# Altium PCB 模型USB.PcbDoc
Units mil, origin at the board's own origin, x right, y up, seen from the top; angles counter-clockwise.
Board outline 640 x 455 mil, 2 copper layers (Top Layer, Bottom Layer); 5 components, 6 nets, 34 pads, 7 vias.
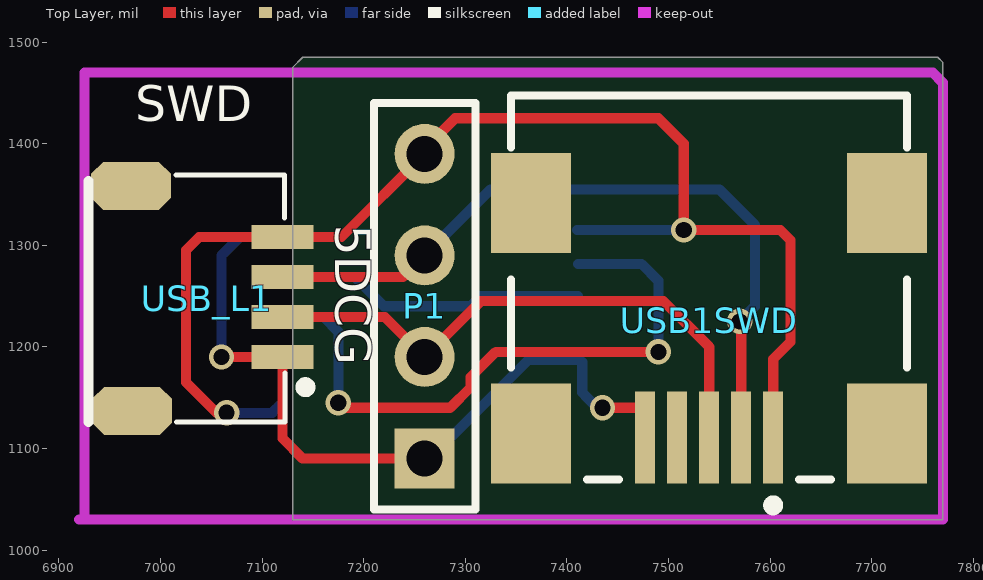
[diagram p0: Top Layer view]
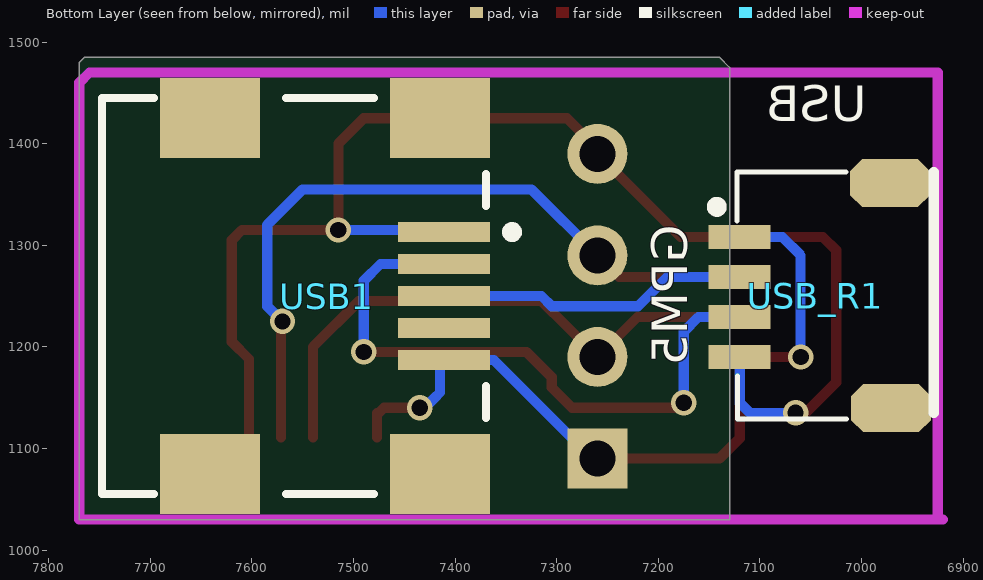
[diagram p1: Bottom Layer view, seen from below]

## Layer stack, top to bottom
Top Layer: signal copper 1.4
Dielectric: dielectric 12.6, FR-4, Dk 4.8
Bottom Layer: signal copper 1.4

## Board outline
7130,1030 7770,1030 7770,1480 7765,1485 7140,1485 7130,1475

## Design rules (kind name [scope] priority, off if disabled: settings)
Clearance [All] p1: gap=10
PolygonConnect [All] p1: connectstyle=Relief reliefconductorwidth=10 reliefentries=4 polygonreliefangle="90 Angle"
RoutingVias [All] p1: holewidth=28 width=50 viastyle="Through Hole" minholewidth=16 minwidth=25 maxholewidth=28 maxwidth=50
SilkscreenOverComponentPads [All] p1: minsilkscreentomaskgap=10
SolderMaskExpansion [All] p1: expansion=4
Width [All] p1: maxlimit=10 minlimit=10 preferedwidth=10
27 further rules are at their usual default settings.

## Components (designator, comment, footprint, x,y, rotation, side; value= is the part's Value field where it differs from the comment)
P1 "Header 4" HDR1X4 7260,1090 r90 top
USB1 "USB-B(Mini)" USB/SM0.8-6H5_M 7720,1250 r0 bottom
USB1SWD "USB-B(Mini)" USB/SM0.8-6H5_M 7540,1420 r90 top
USB_L1 "Header 4" SH1.0-4P 7120,1190 r90 top
USB_R1 "Header 4" SH1.0-4P 7120,1308.11 r270 bottom

## Footprints (in the part's own frame and the unit in brackets; to place one, negate y for a bottom-side part, rotate by r counter-clockwise, add the part's x,y. Pads: shape width x height; smd on the part's side, far side on the other; paste and mask are expansions set on the pad)
HDR1X4 [mm] "Connector; Header; 4 Position"
  rect 1.5x1.5 hole 0.9: 1(0,0)
  round 1.5 hole 0.9: 2(2.54,0) 3(5.08,0) 4(7.62,0)
  silkscreen extent -1.27,-1.27 8.89,1.27
SH1.0-4P [mm]
  rect 0.6x1.55 smd: 1(0,0) 2(1,0) 3(2,0) 4(3,0)
  oct 1.2x2 smd: A(-1.346,3.759) B(4.279,3.785)
  silkscreen extent -1.63,-0.7 4.55,4.85
USB/SM0.8-6H5_M [mm]
  rect 2.3x0.5 smd: 1(-7.85,-1.6) 2(-7.85,-0.8) 3(-7.85,0) 4(-7.85,0.8) 5(-7.85,1.6)
  rect 2.5x2 smd: 6(-7.75,4.45) 7(-1.996,4.45) 8(-7.75,-4.45) 9(-1.996,-4.45)
  silkscreen extent -9.67,-4.95 0.7,4.95

## Part data
P1 USB_L1 USB_R1: "Header, 4-Pin"
USB1 USB1SWD: library part USB5

## Via types
v1: diameter 25, hole 16, Top Layer to Bottom Layer, 7 vias

## Nets (pads, with @x,y where several pads share a name; then routed paths per layer and width w, separated by ;. In a path a pad name is that pad's centre, name@x,y a point inside that pad or via, vN(x,y) a via of type N, cw(c..) or ccw(c..) an arc to the next point about the centre after c; other vN are vias at no path point)
5V: P1.4 USB1.1 USB1SWD.1 USB_L1.4 USB_R1.4 | length 1342.5
  Top Layer w10: v1(7065,1135) 7055,1135 7025,1165 7025,1295 7038.11,1308.11 USB_L1.4 7178.11,1308.11 P1.4 ; P1.4@7257.5,1392.5 7290,1425 7490,1425 7515,1400 v1(7515,1315) 7610,1315 7620,1305 7620,1205 7602.99,1187.99 USB1SWD.1
  Bottom Layer w10: v1(7065,1135) 7110,1135 7120,1145 USB_R1.4 ; USB1.1@7410,1315 v1(7515,1315)
DM: USB1.2 USB_R1.3 | length 630.5
  Top Layer w10: v1@7175,1140 7285,1140 7305,1160 7305,1170 7330,1195 v1(7490,1195)
  Bottom Layer w10: USB_R1.3 7160.63,1229.37 7175,1215 v1(7175,1145) ; USB1.2 7473.5,1281.5 7490,1265 v1(7490,1195)
DP: USB1.3 USB_R1.2 | length 307
  Bottom Layer w10: USB_R1.2 7191.26,1268.74 7220,1240 7305,1240 7315,1250 USB1.3
GND: P1.1 USB1.5 USB1SWD.5 USB_L1.1 USB_R1.1 | length 779.3
  Top Layer w10: v1(7060,1190) USB_L1.1 7120,1110 7140,1090 P1.1 ; v1(7435,1140) 7470,1140 USB1SWD.5@7475,1135 ; USB1SWD.5 USB1SWD.5@7477.01,1135
  Bottom Layer w10: v1(7060,1190) 7060,1290 7078.11,1308.11 USB_R1.1 ; P1.1@7250,1095 7270,1095 7362.01,1187.01 USB1.5 ; USB1.5@7415,1185 7415,1155 7420,1150 v1@7435,1135
SCK: P1.2 USB1SWD.3 USB_L1.2 | length 566.8
  Top Layer w10: USB_L1.2 7220.63,1229.37 P1.2 7290,1220 7315,1245 7495,1245 7540,1200 USB1SWD.3
SWD: P1.3 USB1SWD.2 USB_L1.3 | length 731.1
  Top Layer w10: USB_L1.3 7238.74,1268.74 P1.3 ; v1(7570,1225) 7571.5,1223.5 USB1SWD.2
  Bottom Layer w10: P1.3 7325,1355 7550,1355 7585,1320 7585,1240 v1(7570,1225)
pads on no net: USB1.4 USB1.6 USB1.7 USB1.8 USB1.9 USB1SWD.4 USB1SWD.6 USB1SWD.7 USB1SWD.8 USB1SWD.9 USB_L1.A USB_L1.B USB_R1.A USB_R1.B

## Keep-outs
Keep-Out Layer:
  lines w10: 6920,1030 7770,1030 7770,1460 7760,1470 6925,1470 6925,1030

## Silkscreen, mask and mechanical layers (free items; w line width, h text height)
Top Overlay:
  text "SWD" at 6975,1410 h60
  text "5DCG" at 7160,1320 h60 r270
Bottom Overlay:
  text "USB" at 6995,1410 h60
  text "GPM5" at 7160,1320 h60 r270